# EAGLE board Jeep_BT_Switcher (EAGLE 7.4.0)
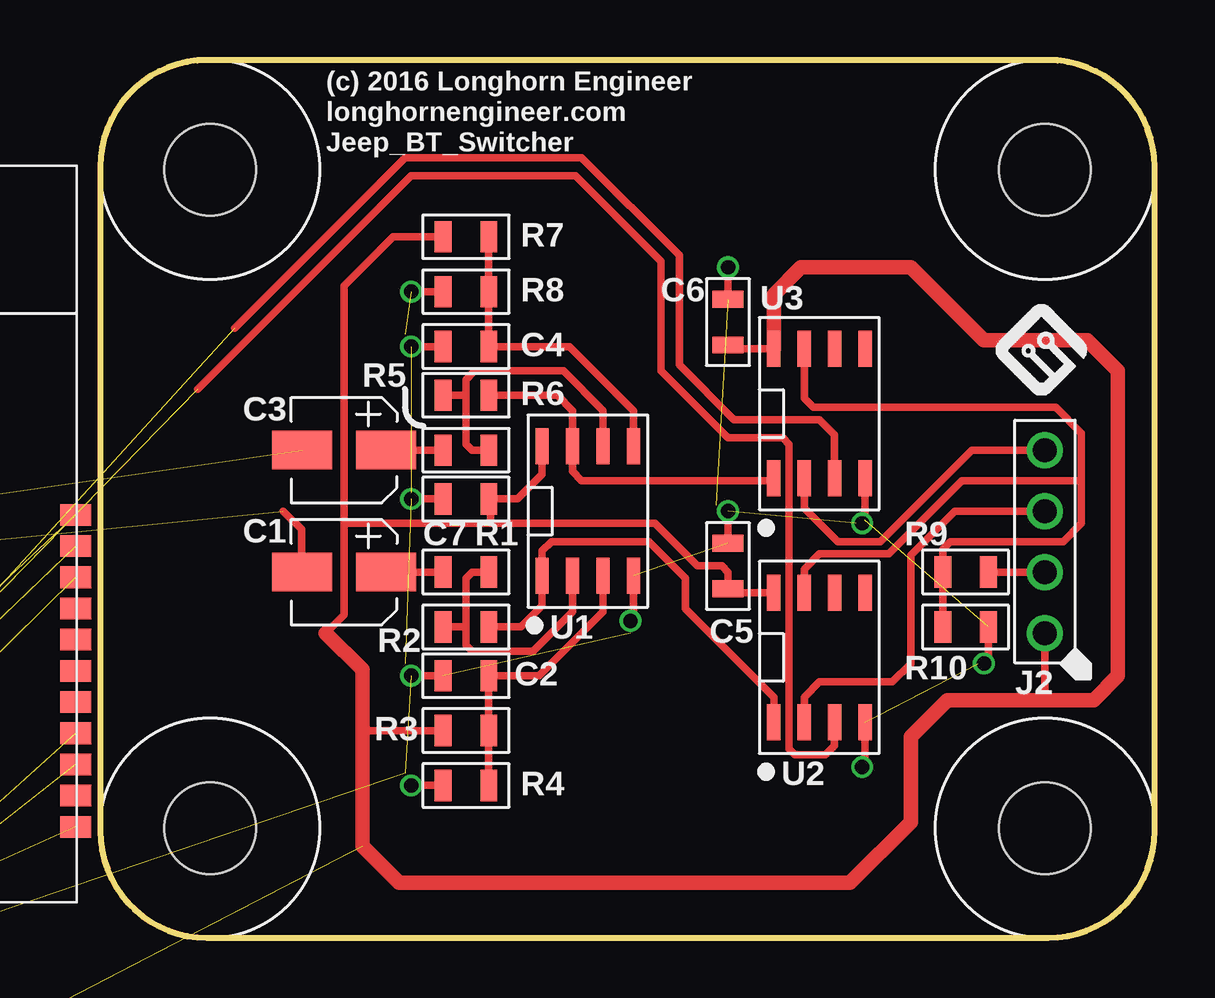
[diagram p0: board, top side]
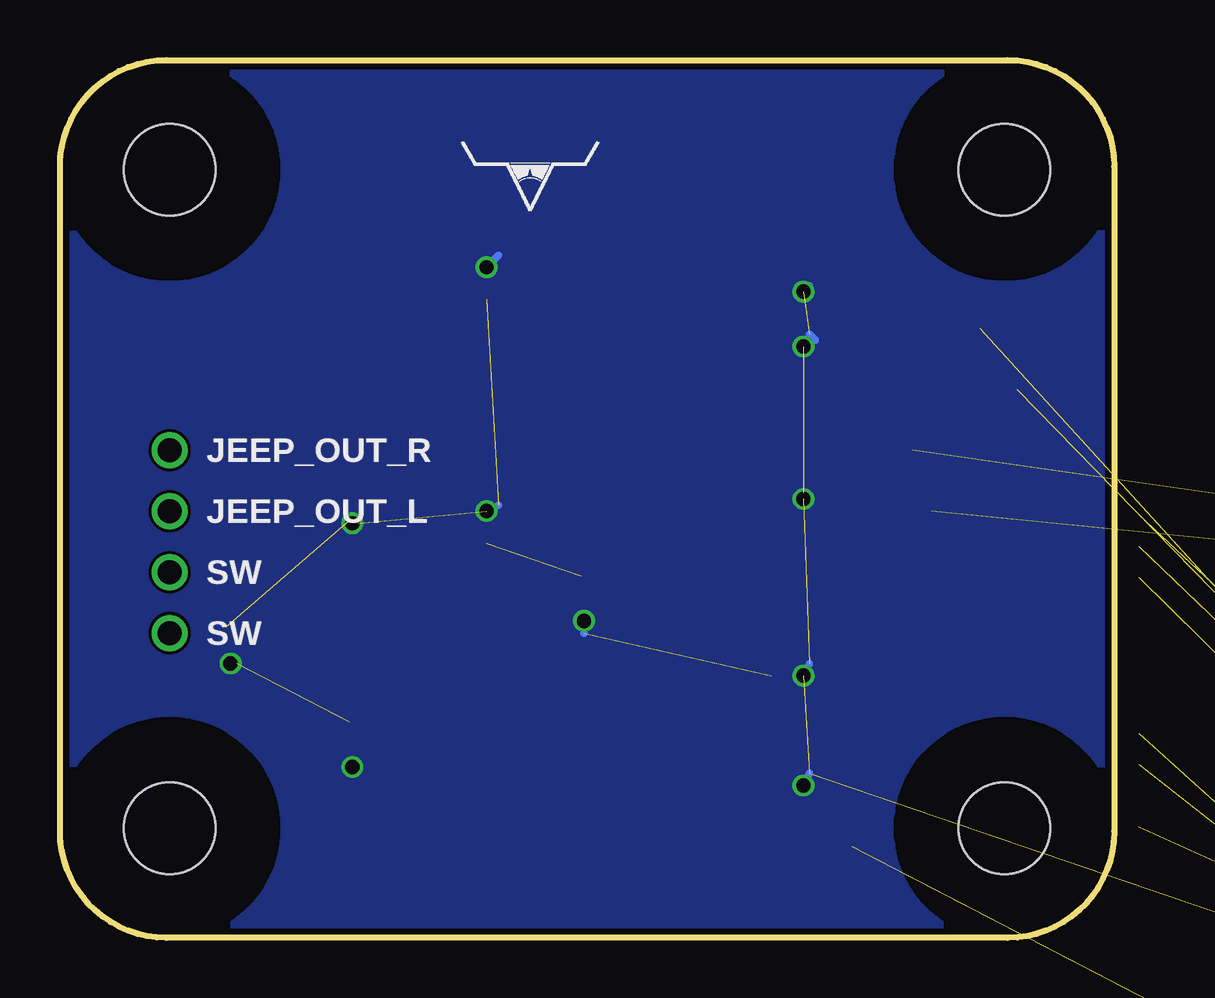
[diagram p1: board, bottom side, seen from below]

Size 43.94 x 36.58 mm. Coordinates in mm from the lower left corner, seen from the top.
Outline: 0,32.13 0,4.45 arc90 4.45,0 39.5,0 arc90 43.94,4.45 43.94,32.13 arc90 39.5,36.58 4.45,36.58 arc90 0,32.13
Copper layers (1*16): Top 0.035mm / dielectric 1.5mm / Bottom 0.035mm
Design rules "MF_Standard_2_Layer": minimum track width 5mil, minimum drill 12mil, track to track 5mil, track to pad 5mil, pad to pad 5mil, via to via 5mil, smd to smd 0mil, copper to edge 10mil, drill to drill 10mil, minimum pad ring 6mil, minimum via ring 6mil, stop-mask expansion 2mil, vias tented up to drill 25mil, thermal gap 10mil

## Footprints (pad centres in the part's own frame; a part is rotated, then mirrored left to right if it is on the bottom)
ROUND_TP = smd 1 x 1: P$1 0,0
CP4MM = smd 1.6 x 2.5: P$1 0,-1.75; P$2 0,1.75
C0805 = smd 0.7 x 1.3: P$1 -0.95,0; P$2 0.95,0
CP10MM = smd 2 x 4.1: P$1 0,-4.35; P$2 0,4.35
CP6.3MM = smd 1.6 x 3.2: P$1 0,-2.7; P$2 0,2.7
LED0805 = smd 1.1 x 1.25: ANODE 1.25,0; CATHODE -1.25,0
MOUNT_HOLE_150MIL = hole 3.81: 0,0
PTH_2.54MM_01X04 = drill 1: P$1 -3.81,0; P$2 -1.27,0; P$3 1.27,0; P$4 3.81,0
R0805 = smd 0.7 x 1.3: P$1 -0.95,0; P$2 0.95,0
AZ4558C_SOIC-8 = smd 1.5 x 0.55: 1 -2.7,1.905; 2 -2.7,0.635; 3 -2.7,-0.635; 4 -2.7,-1.905; 5 2.7,-1.905; 6 2.7,-0.635; 7 2.7,0.635; 8 2.7,1.905
XS3868 = smd 1.3 x 0.9: 1.8V_OUT 0,2; 34 0,4.6; 42 17,8.3; 51 17,12.2; AGND 0,16.3; ALEFT 0,13.7; ARIGHT 0,15; BACK 17,14.8; CH.POW. 0,7.2; CH.STAT. 0,9.8; CHARGE 0,8.5; GND 0,5.9; MIC+ 0,12.4; MIC- 0,11.1; NEXT 17,13.5; P$15 17,4.4; PLAY 17,16.1; RST 17,3.1; RX 17,10.9; TX 17,9.6; VBAT 0,3.3; VOL+ 17,5.7; VOL- 17,7

## Placement (x,y rotation side)
BACK  [ROUND_TP]  -29.46,-10.92 0 top  (outside the outline)
BACK1  [ROUND_TP]  -39.88,-29.46 0 top  (outside the outline)
C1  10uF  [CP4MM]  10.16,15.24 90 top
C2  1uF  [C0805]  15.24,10.92 180 top
C3  10uF  [CP4MM]  10.16,20.32 90 top
C4  1uF  [C0805]  15.24,24.64 180 top
C5  0.1uF  [C0805]  26.16,15.49 90 top
C6  0.1uF  [C0805]  26.16,25.65 90 top
C7  0.1uF  [C0805]  15.24,18.29 180 top
C8  0.1uF  [C0805]  -16.51,-2.79 0 top  (outside the outline)
C9  220uF  [CP10MM]  -24.38,2.79 0 top  (outside the outline)
C10  47uF  [CP6.3MM]  -36.58,-19.3 0 top  (outside the outline)
D1  MF-LED-0805-RED  [LED0805]  -28.45,-21.34 0 top  (outside the outline)
H1  MOUNT_HOLE150MIL  [MOUNT_HOLE_150MIL]  4.57,4.57 0 top
H2  MOUNT_HOLE150MIL  [MOUNT_HOLE_150MIL]  39.37,32 0 top
H3  MOUNT_HOLE150MIL  [MOUNT_HOLE_150MIL]  39.37,4.57 0 top
H4  MOUNT_HOLE150MIL  [MOUNT_HOLE_150MIL]  4.57,32 0 top
J1  MF-CON-2.54mm-01x04  [PTH_2.54MM_01X04]  -46.99,-28.19 0 top  (outside the outline)
J2  MF-CON-2.54mm-01x04  [PTH_2.54MM_01X04]  39.37,16.51 90 top
NEXT  [ROUND_TP]  -29.72,-13.21 0 top  (outside the outline)
NEXT1  [ROUND_TP]  -40.13,-31.75 0 top  (outside the outline)
PLAY  [ROUND_TP]  -29.21,-8.64 0 top  (outside the outline)
PLAY1  [ROUND_TP]  -39.62,-27.18 0 top  (outside the outline)
R1  100K  [R0805]  15.24,15.24 0 top
R2  50K  [R0805]  15.24,12.95 0 top
R3  100K  [R0805]  15.24,8.64 0 top
R4  50K  [R0805]  15.24,6.35 180 top
R5  100K  [R0805]  15.24,20.32 0 top
R6  50K  [R0805]  15.24,22.61 0 top
R7  100K  [R0805]  15.24,29.21 0 top
R8  50K  [R0805]  15.24,26.92 180 top
R9  10K  [R0805]  36.07,15.24 180 top
R10  10K  [R0805]  36.07,12.95 0 top
R11  10K  [R0805]  -27.69,-6.35 0 top  (outside the outline)
R12  470  [R0805]  -28.7,-24.89 0 top  (outside the outline)
U1  AZ4558C  [AZ4558C_SOIC-8]  20.32,17.78 90 top
U2  MAX4544CSA+  [AZ4558C_SOIC-8]  29.97,11.68 90 top
U3  MAX4544CSA+  [AZ4558C_SOIC-8]  29.97,21.84 90 top
U4  XS-3868  [XS3868]  -18.03,1.52 0 top
U$11  LHE_FRAME  [LHE_FRAME]  9.4,30.23 0 top
U$12  MF_LOGOLOGO_SMALL  [MF_LOGO_SMALL]  37.34,22.61 0 top
U$13  LHE_LOGOLHE_LOGO  [LHE_LOGO]  22.35,30.23 0 bottom
VOL+  [ROUND_TP]  -29.97,-15.49 0 top  (outside the outline)
VOL+1  [ROUND_TP]  -40.39,-34.04 0 top  (outside the outline)
VOL-  [ROUND_TP]  -30.23,-17.78 0 top  (outside the outline)
VOL-1  [ROUND_TP]  -40.64,-36.32 0 top  (outside the outline)

## Library data of the parts
BACK BACK1 H1-H4 NEXT NEXT1 PLAY PLAY1 VOL+ VOL+1 VOL- VOL-1 = PP_Connectors; POPULATE: 1
C1-C10 R1-R12 = MF_Passives; POPULATE: 1
D1 = MF_LEDs; HOUSEPART: YES; MPN: MF-LED-0805-RED; POPULATE: 1; URL: https://factory.macrofab.com/part/MF-LED-0805-RED
J1 = MF_Connectors; HOUSEPART: YES; LABEL01: VCC; LABEL02: GND; LABEL03: JEEP_IN_L; LABEL04: JEEP_IN_R; MPN: MF-CON-2.54mm-01x04; POPULATE: 1; URL: https://factory.macrofab.com/part/MF-CON-2.54mm-01x04
J2 = MF_Connectors; HOUSEPART: YES; LABEL01: SW; LABEL02: SW; LABEL03: JEEP_OUT_L; LABEL04: JEEP_OUT_R; MPN: MF-CON-2.54mm-01x04; POPULATE: 1; URL: https://factory.macrofab.com/part/MF-CON-2.54mm-01x04
U1-U3 = PP_AnalogIC
U4 = PP_Sensors
U$11 = PP_Aesthetics; DNAME: Parker Dillmann; REVNUM: REV: 3
U$12 U$13 = PP_Aesthetics

## Nets
1.8V: BACK1.P$1 C9.P$1 NEXT1.P$1 PLAY1.P$1 R11.P$2 U4.1.8V_OUT VOL+1.P$1 VOL-1.P$1
4.0V: C10.P$1 R12.P$1 U4.VBAT
BACK: BACK.P$1 U4.BACK
BT_L: C1.P$2 U4.ALEFT
BT_R: C3.P$2 U4.ARIGHT
GND: C2.P$2 C4.P$2 C5.P$2 C6.P$2 C7.P$2 C8.P$2 C9.P$2 C10.P$2 J1.P$2 R4.P$2 R8.P$2 R10.P$2 U1.4 U2.4 U3.4 U4.GND
JEEP_IN_L: J1.P$3 U2.3
JEEP_IN_R: J1.P$4 U3.3
JEEP_OUT_L: J2.P$3 U2.2
JEEP_OUT_R: J2.P$4 U3.2
LED: D1.CATHODE U4.CH.STAT.
N$1: R1.P$2 R2.P$1 U1.2
N$2: R5.P$2 R6.P$1 U1.6
N$3: C1.P$1 R1.P$1
N$4: C2.P$1 R3.P$2 R4.P$1 U1.3
N$5: C3.P$1 R5.P$1
N$6: C4.P$1 R7.P$2 R8.P$1 U1.5
N$7: R9.P$2 R10.P$1 U2.7 U3.7
N$8: U4.AGND
N$10: D1.ANODE R12.P$2
NEXT: NEXT.P$1 U4.NEXT
OUT_L: R2.P$2 U1.1 U2.1
OUT_R: R6.P$2 U1.7 U3.1
PLAY: PLAY.P$1 U4.PLAY
RST: C8.P$1 R11.P$1 U4.RST
SW: J2.P$2 R9.P$1
VCC: C5.P$1 C6.P$1 C7.P$1 J1.P$1 J2.P$1 R3.P$1 R7.P$1 U1.8 U2.8 U3.8
VOL+: U4.VOL+ VOL+.P$1
VOL-: U4.VOL- VOL-.P$1

## Tracks (layer width: path | path; a pad name or v marks a point on that pad's centre or on a via)
1.8V  (7 unrouted)
4.0V  (2 unrouted)
BACK  (1 unrouted)
BT_L  (1 unrouted)
  Top 0.305: 7.62,17.78 8.38,17.02 8.38,15.27 C1.P$2
BT_R  (1 unrouted)
GND  (via drill 0.6)  (15 unrouted)
  Top 0.305: U1.4 22.23,13.34 v22.1,13.21 | C2.P$2 v12.95,10.92 | R4.P$2 v12.95,6.35 | C4.P$2 v12.95,24.64 | R8.P$2 v12.95,26.92 | U2.4 31.88,7.24 v31.75,7.11 | U3.4 31.88,17.4 v31.75,17.27 | C6.P$2 v26.16,27.94 | C5.P$2 v26.16,17.78 | R10.P$2 37.02,11.62 v36.83,11.43 | C7.P$2 v12.95,18.29
  Bottom 0.305: v22.1,13.21 22.1,12.7 | v12.95,10.92 12.7,11.43 | v12.95,6.35 12.7,6.86 | v12.95,24.64 12.45,24.89 12.7,25.15 | v12.95,26.92 12.7,27.18 | v31.75,17.27 31.5,17.27 | v26.16,27.94 25.65,28.45 | v26.16,17.78 25.65,18.03 | v36.83,11.43 36.58,11.43 | v12.95,18.29 12.95,18.54
  pour Bottom: 4.45,36.58 39.5,36.58 arc-90 43.94,32.13 43.94,4.45 arc-90 39.5,0 4.45,0 arc-90 0,4.45 0,32.13 arc-90
JEEP_IN_L  (1 unrouted)
  Top 0.305: 4.06,22.86 12.95,31.75 19.81,31.75 23.37,28.19 23.37,23.62 26.16,20.83 28.45,20.83 28.7,20.57 28.7,7.87 28.96,7.62 30.23,7.62 30.61,8 U2.3
JEEP_IN_R  (1 unrouted)
  Top 0.305: 5.59,25.4 12.7,32.51 20.07,32.51 24.13,28.45 24.13,23.88 26.42,21.59 29.97,21.59 30.61,20.95 U3.3
JEEP_OUT_L
  Top 0.305: U2.2 29.34,10.03 29.97,10.67 33.02,10.67 33.78,11.43 33.78,15.95 35.61,17.78 J2.P$3
JEEP_OUT_R
  Top 0.305: U3.2 29.34,17.91 30.73,16.51 32.51,16.51 36.32,20.32 J2.P$4
LED  (1 unrouted)
N$1
  Top 0.305: 15.24,12.95 15.24,12.19 15.49,11.94 18.03,11.94 19.68,13.59 U1.2 | 15.24,12.95 15.24,14.99 15.49,15.24 R1.P$2 | R2.P$1 15.24,12.95
N$2
  Top 0.305: R6.P$1 15.24,22.61 | 15.24,22.61 15.24,20.57 15.49,20.32 R5.P$2 | U1.6 20.95,21.97 19.3,23.62 15.6,23.62 15.24,23.26 15.24,22.61
N$3
  Top 0.305: C1.P$1 R1.P$1
N$4
  Top 0.305: R4.P$1 R3.P$2 C2.P$1 18.29,10.92 20.95,13.59 U1.3
N$5
  Top 0.305: C3.P$1 R5.P$1
N$6
  Top 0.305: R7.P$2 R8.P$1 C4.P$1 19.56,24.64 22.23,21.97 U1.5
N$7
  Top 0.305: 40.89,19.05 35.91,19.05 32.87,16 29.97,16 29.34,15.37 U2.7 | R10.P$1 R9.P$2 35.12,16.19 35.43,16.51 40.13,16.51 40.89,17.27 40.89,19.05 | U3.7 29.34,22.48 29.72,22.1 39.82,22.1 40.89,21.02 40.89,19.05
N$10  (1 unrouted)
NEXT  (1 unrouted)
OUT_L
  Top 0.305: R2.P$2 17.53,12.95 18.41,13.84 U1.1 18.41,16.13 18.8,16.51 22.86,16.51 24.38,14.99 24.38,13.72 28.07,10.03 U2.1
OUT_R
  Top 0.305: R6.P$2 19.05,22.61 19.68,21.97 U1.7 19.68,19.43 20.07,19.05 27.97,19.05 U3.1
PLAY  (1 unrouted)
RST  (2 unrouted)
SW
  Top 0.305: J2.P$2 R9.P$1
VCC  (1 unrouted)
  Top 0.305: C6.P$1 26.16,24.54 U3.8 | 26.16,14.48 C5.P$1 26.16,15.24 25.91,15.49 24.89,15.49 23.11,17.27 16.26,17.27 | 26.16,14.48 26.16,14.38 U2.8 26.26,14.38 26.16,14.48 | R3.P$1 10.92,8.64 | 16.26,17.27 10.16,17.27 | 9.4,12.7 10.16,13.46 10.16,17.27 | U1.8 18.41,19.31 17.39,18.29 16.26,18.29 | R7.P$1 12.19,29.21 10.16,27.18 10.16,17.27 | J2.P$1 39.37,9.91 | C7.P$1 16.26,18.29 | 16.26,18.29 16.26,17.27
  Top 0.61: 9.4,12.7 10.92,11.18 10.92,8.64 10.92,3.81 12.45,2.29 31.24,2.29 33.78,4.83 33.78,8.38 35.31,9.91 39.37,9.91 41.4,9.91 42.42,10.92 42.42,23.62 41.15,24.89 36.83,24.89 33.78,27.94 31.24,27.94 29.72,27.94 29.21,27.94 28.07,26.8 U3.8
VOL+  (1 unrouted)
VOL-  (1 unrouted)